# Altium PCB Serializer_System2.PcbDoc
Units mm, origin at the board's own origin, x right, y up, seen from the top; angles counter-clockwise.
Board outline 13 x 16.5 mm, 4 copper layers (Top Layer, MidLayer1, MidLayer2, Bottom Layer), stack 0.767 mm thick; 63 components, 45 nets, 230 pads, 74 vias.
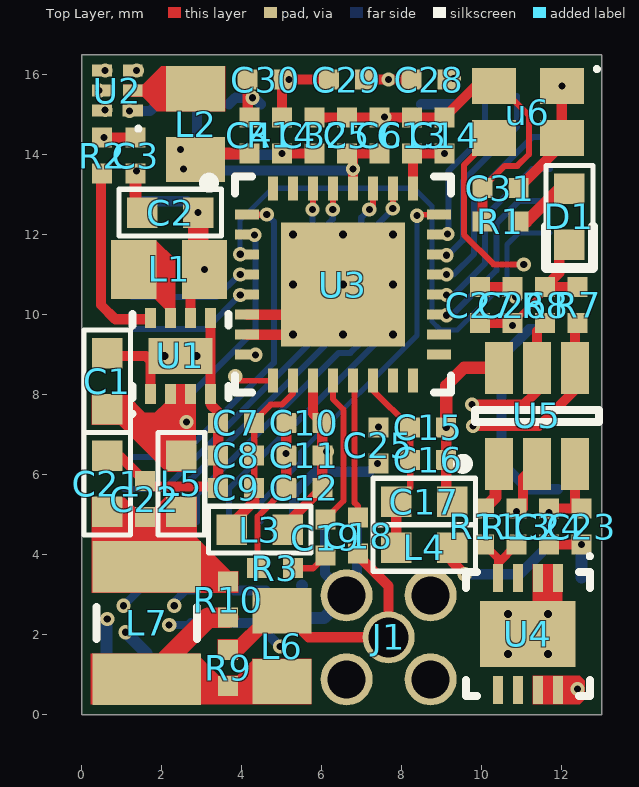
[diagram p0: Top Layer view]
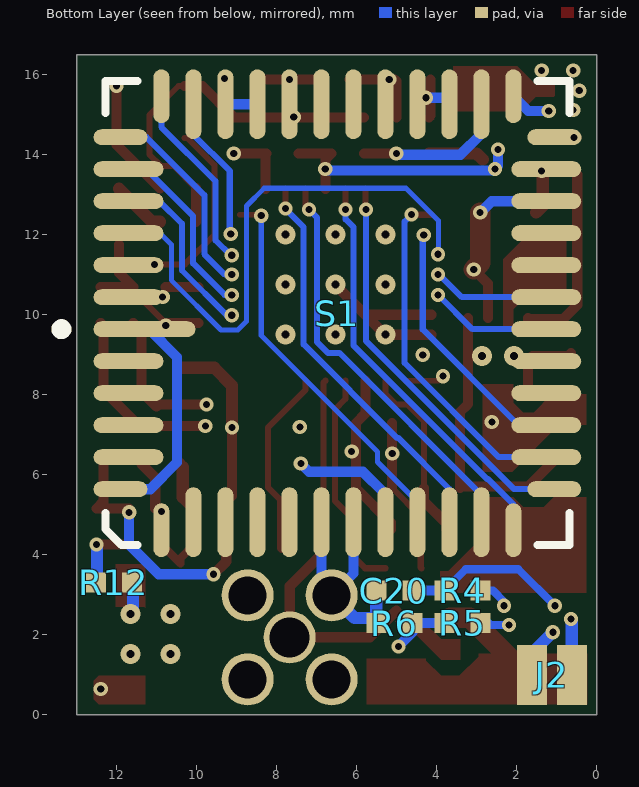
[diagram p1: Bottom Layer view, seen from below]
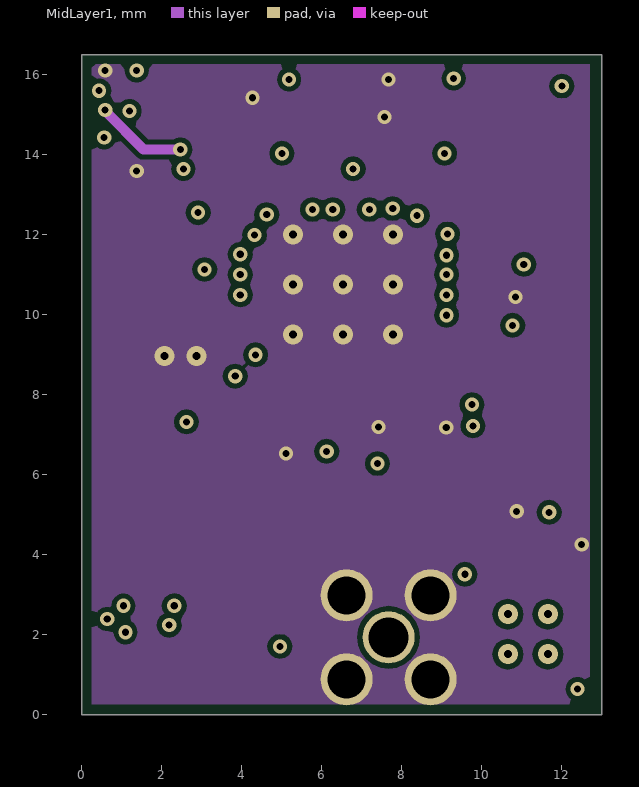
[diagram p2: MidLayer1]
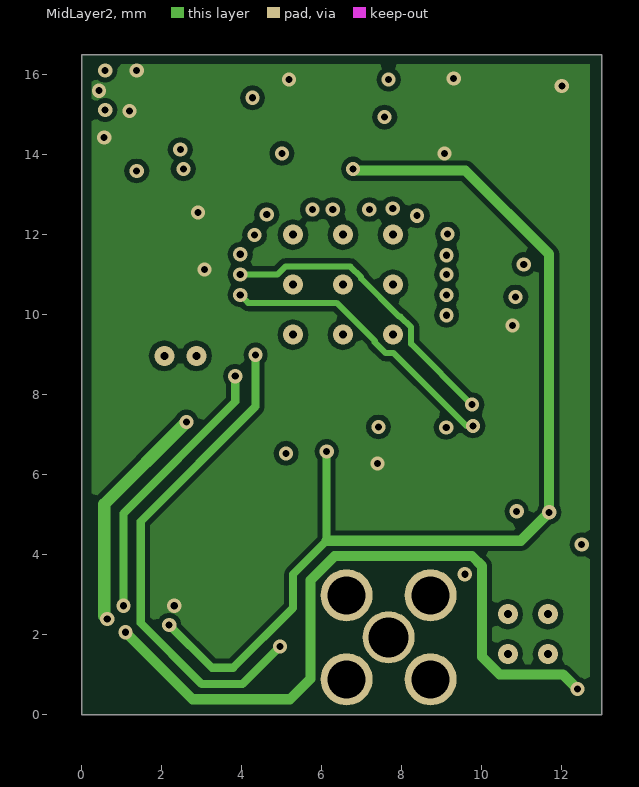
[diagram p3: MidLayer2]

## Layer stack, top to bottom
Top Solder: solder mask 0.0102, Solder Resist, Dk 3.5
Top Layer: signal copper 0.0356
Dielectric1: core 0.1524, FR-4 High TG, Dk 4.8
MidLayer1: signal copper 0.0356
Dielectric2: prepreg 0.32, FR-4 High TG, Dk 4.8
MidLayer2: signal copper 0.0356
Dielectric3: core 0.1524, FR-4 High TG, Dk 4.8
Bottom Layer: signal copper 0.0356
Bottom Solder: solder mask 0.0102, Solder Resist, Dk 3.5

## Board outline
0,0 13,0 13,16.5 0,16.5

## Design rules (kind name [scope] priority, off if disabled: settings)
Clearance [All] p1: gap=0.127
PolygonConnect [All] p1: connectstyle=Direct reliefconductorwidth=0.254 reliefentries=4 polygonreliefangle="90 Angle" airgapwidth=0.254
RoutingVias [All] p1: holewidth=0.254 width=0.559 viastyle="Through Hole" minholewidth=0.178 minwidth=0.356 maxholewidth=0.711 maxwidth=1.27
SolderMaskExpansion [All] p1: expansion=0.025
UnpouredPolygon [All] p1: allowunpoured=FALSE
Width [All] p1: maxlimit=2.54 minlimit=0.127 preferedwidth=0.254 minimp=50.000000 maximp=50.000000 favimp=50.000000
29 further rules are at their usual default settings.

## Classes and differential pairs
component class Connector: J2
net class DIN[0..11]: DIN0 DIN1 DIN2 DIN3 DIN4 DIN5 DIN6 DIN7 DIN8 DIN9 DIN10 DIN11
component class Serializer: C5 C6 C7 C8 C9 C10 C11 C12 C13 C14 C15 C16 C17 C18 C19 C20 L3 L4 R3 R4 R5 R6 R7 R8 U3
component class Power: C1 C2 C3 C4 D1 L1 L2 R1 R2 U1 U2
component class "LED Driver": C23 C24 R11 R12 R13 U4 U5
component class "Coax Port": C21 C22 J1 L5 L6 L7 R9 R10
component class "CMOS Sensor": C23 C24 C25 C26 C27 C30 R14 S1 u6

## Components (designator, comment, footprint, x,y, rotation, side; value= is the part's Value field where it differs from the comment)
C1 "10uF" "SMD Capacitor 0603" 0.635,8.331 r90 top
C2 "22uF" "SMD Capacitor 0603" 2.21,12.548 r180 top
C3 "2.2uF" "SMD CAP 0402" 1.346,13.97 r270 top
C4 "4.7uF" "SMD CAP 0402" 4.191,14.478 r90 top
C5 "0.1uF" "SMD CAP 0402" 6.629,14.478 r90 top
C6 "0.01uF" "SMD CAP 0402" 7.442,14.478 r90 top
C7 "0.1uF" "SMD CAP 0402" 3.861,7.29 r180 top
C8 "0.01uF" "SMD CAP 0402" 3.861,6.477 r180 top
C9 "4.7uF" "SMD CAP 0402" 3.861,5.664 r180 top
C10 "0.1uF" "SMD CAP 0402" 5.563,7.29 r180 top
C11 "0.01uF" "SMD CAP 0402" 5.563,6.477 r180 top
C12 "4.7uF" "SMD CAP 0402" 5.563,5.664 r180 top
C13 "0.1uF" "SMD CAP 0402" 8.255,14.478 r90 top
C14 "0.01uF" "SMD CAP 0402" 9.068,14.478 r90 top
C15 "0.1uF" "SMD CAP 0402" 8.661,7.177 r0 top
C16 "0.01uF" "SMD CAP 0402" 8.661,6.364 r0 top
C17 "22uF" "SMD Capacitor 0603" 8.559,5.322 r0 top
C18 "0.1uF" "SMD CAP 0402" 6.909,4.47 r270 top
C19 "0.047uF" "SMD CAP 0402" 6.096,4.42 r270 top
C20 "10uF" "SMD CAP 0402" 5.055,3.099 r0 bottom
C21 "4.7uF" "SMD Capacitor 0603" 0.635,5.766 r90 top
C22 ".1uF" "SMD CAP 0402" 1.575,5.385 r90 top
C23 "100nF" "SMD CAP 0402" 12.497,4.699 r270 top
C24 "1uF" "SMD CAP 0402" 11.684,4.699 r270 top
C25 "100nF" "SMD CAP 0402" 7.417,6.731 r90 top
C26 "100nF" "SMD CAP 0402" 10.77,10.236 r90 top
C27 "4.7uF" "SMD CAP 0402" 9.957,10.236 r90 top
C28 "100nF" "SMD CAP 0402" 8.687,15.875 r180 top
C29 "4.7uF" "SMD CAP 0402" 6.629,15.875 r0 top
C30 "100nF" "SMD CAP 0402" 4.597,15.875 r180 top
C31 "10nF" "SMD CAP 0402" 10.465,13.157 r180 top
C32 "100nF" "SMD CAP 0402" 5.817,14.478 r90 top
D1 "LED 0603" LED_0603 12.192,12.446 r90 top
J1 "Coax Connector" "SSMCX Throughhole Molex" 7.671,1.93 r0 top
J2 "2 Pin Connector" "2pin smd pad for LED connector" 1.118,0.991 r0 bottom
L1 "Ferrite Bead" LQM21PN2R2MC0D 2.184,11.125 r0 top
L2 "Ferrite Bead" LQM21PN2R2MC0D 2.845,14.757 r270 top
L3 "Ferrite Bead" BLM18KG601SN1D 4.445,4.623 r180 top
L4 "Ferrite Bead" BLM18KG601SN1D 8.56,4.166 r0 top
L5 "Ferrite Bead" BLM18KG601SN1D 2.489,5.766 r90 top
L6 "Ferrite Bead" CIG21L4R7MNE 5.004,1.71 r270 top
L7 "Ferrite Bead" CBC3225T101MR 1.626,2.286 r90 top
R1 "500" "SMD RES 0402" 10.465,12.319 r180 top
R2 "100k" "SMD RES 0402" 0.508,13.97 r90 top
R3 "49.9" "SMD RES 0402" 4.826,3.658 r180 top
R4 "10k" "SMD RES 0402" 3.353,3.099 r0 bottom
R5 "10k" "SMD RES 0402" 3.353,2.286 r180 bottom
R6 "100k" "SMD RES 0402" 5.055,2.286 r180 bottom
R7 "3.3k" "SMD RES 0402" 12.395,10.236 r90 top
R8 "3.3k" "SMD RES 0402" 11.582,10.236 r90 top
R9 "1k" "SMD RES 0402" 3.658,1.168 r270 top
R10 "1k" "SMD RES 0402" 3.658,2.87 r90 top
R11 "1k" "SMD RES 0402" 10.058,4.699 r270 top
R12 "10" "SMD RES 0402" 12.065,3.302 r0 bottom
R13 "1.25k" "SMD RES 0402" 10.871,4.699 r270 top
R14 "10k" "SMD RES 0402" 5.004,14.478 r90 top
S1 "CMOS Sensor MT9V032" "CMOS Sensor MT9V032_HD" 6.477,10.033 r90 bottom
U1 "TPS62172DSGT" DSG8-1600X900TP 2.464,8.966 r90 top
U2 "TPS62231DRYT" DRY6 0.889,15.596 r180 top
U3 "DS90UR913A" "WQFN32 for DS90UB913A" 6.528,10.744 r0 top
U4 "LT3092EDD#PBF" LT-DD-8_V 11.151,2.007 r270 top
U5 "DAC5571IDBVR" TI-DBV6_M 11.379,7.468 r90 top
u6 "OSC_26MHz_EPSON" "OSC SG_211SCE 26MHz" 11.151,15.062 r270 top

## Footprints (in the part's own frame and the unit in brackets; to place one, negate y for a bottom-side part, rotate by r counter-clockwise, add the part's x,y. Pads: shape width x height; smd on the part's side, far side on the other; paste and mask are expansions set on the pad)
"2pin smd pad for LED connector" [mm] "1mm pitch"
  rect 0.75x1.5 smd mask+0: 1(-0.5,0) 2(0.5,0)
BLM18KG601SN1D [mil] "0603 Ferrite Chip 600OHM 1.3A"
  rect 30x30 smd: 1(-27.5,0) 2(27.5,0)
  silkscreen extent -50,-23 50,23, body extent -32,-15 32,15, height 19
CBC3225T101MR [mm] "Chip Inductor, 2-Leads, Body 3.20x2.50mm, IPC Medium Density, 100uH, 340mA, 1.82OHM"
  rect 1.29x2.72 smd: 1(-1.405,0) 2(1.405,0)
  silkscreen extent -0.4,-1.26 0.4,1.26, body extent -1.7,-1.35 1.7,1.35, height 2.7
CIG21L4R7MNE [mm] "SMD 0805 4.7uH, 750mA"
  rect 1.13x1.47 smd: 1(-0.885,0) 2(0.885,0)
  body extent -1.1,-0.72 1.1,0.72, height 1.05
"CMOS Sensor MT9V032_HD" [mm] "LCC, 48-Pins, Body 11.43x11.43mmx2.50mm, Pitch 0.80mm, IPC High Density"
  oval 0.4x2.546 smd: 1(-0.4,4.823)
  oval 0.4x1.746 smd: 2(-1.2,5.223) 3(-2,5.223) 4(-2.8,5.223) 5(-3.6,5.223) 20(-3.6,-5.223) 21(-2.8,-5.223) 22(-2,-5.223) 23(-1.2,-5.223) 24(-0.4,-5.223) 25(0.4,-5.223) 26(1.2,-5.223) 27(2,-5.223) 28(2.8,-5.223) 29(3.6,-5.223) 44(3.6,5.223) 45(2.8,5.223) 46(2,5.223) 47(1.2,5.223) 48(0.4,5.223)
  oval 0.4x1.346 smd: 6(-4.4,5.423) 19(-4.4,-5.423) 30(4.4,-5.423) 43(4.4,5.423)
  oval 1.346x0.4 smd: 7(-5.423,4.4) 18(-5.423,-4.4) 31(5.423,-4.4) 42(5.423,4.4)
  oval 1.746x0.4 smd: 8(-5.223,3.6) 9(-5.223,2.8) 10(-5.223,2) 11(-5.223,1.2) 12(-5.223,0.4) 13(-5.223,-0.4) 14(-5.223,-1.2) 15(-5.223,-2) 16(-5.223,-2.8) 17(-5.223,-3.6) 32(5.223,-3.6) 33(5.223,-2.8) 34(5.223,-2) 35(5.223,-1.2) 36(5.223,-0.4) 37(5.223,0.4) 38(5.223,1.2) 39(5.223,2) 40(5.223,2.8) 41(5.223,3.6)
  silkscreen extent -5.8,-5.8 5.8,7.02, body extent -5.71,-5.71 5.71,5.71, height 2.5
DRY6 [mm] "PSON, 6-Leads, Body 1x1.45mm, Pitch 0.5mm, TI Recommended"
  rect 0.52x0.3 smd paste+0 mask+0.05: 1(-0.385,0.5)
  rect 0.49x0.3 smd paste+0 mask+0.05: 2(-0.385,0) 3(-0.385,-0.5) 4(0.385,-0.5) 5(0.385,0) 6(0.385,0.5)
  silkscreen extent -0.58,0.9 -0.48,1, body extent -0.53,-0.75 0.53,0.75, height 0.6
DSG8-1600X900TP [mm] "SON, 8-Leads, Body 2x2mm, Pitch 0.5mm, Thermal Pad 1.6x0.9mm, TI Recommended"
  rect 0.5x0.28 smd paste-0.14 mask+0.07: 1(-0.95,0.75) 2(-0.95,0.25) 3(-0.95,-0.25) 4(-0.95,-0.75) 5(0.95,-0.75) 6(0.95,-0.25) 7(0.95,0.25) 8(0.95,0.75)
  rect 0.9x1.6 smd paste-0.45 mask+0.07: 9(0,0)
  silkscreen extent -1.5,-1.2 1.05,1.25, body extent -1.05,-1.05 1.05,1.05, height 0.8
LED_0603 [mil] "LTST-C190KGKT"
  rect 30x30 smd: A(-27.5,0) C(27.5,0)
  silkscreen extent -50,-23 50,23, body extent -32,-15 32,15, height 20
LQM21PN2R2MC0D [mm] "SMD Fixed Ind. 2.2uH, 600mA, 0805"
  rect 1.13x1.47 smd: 1(-0.885,0) 2(0.885,0)
  body extent -1.1,-0.72 1.1,0.72, height 1.05
LT-DD-8_V [mm] "SON, 8-Leads, Body 3x3mm, Pitch 0.5mm, Thermal Pad 1.65x2.38 mm, IPC Low Density"
  rect 0.7x0.25 smd mask+0.102: 1(-1.4,0.75) 2(-1.4,0.25) 3(-1.4,-0.25) 4(-1.4,-0.75) 5(1.4,-0.75) 6(1.4,-0.25) 7(1.4,0.25) 8(1.4,0.75)
  rect 1.65x2.38 smd mask+0.102: 9(0,0)
  silkscreen extent -2,-1.55 1.55,1.6, body extent -1.5,-1.5 1.5,1.5, height 0.8
"OSC SG_211SCE 26MHz" [mm] "DFN, 4-Leads, Body 2.50x2.00mm, Pitch 1.70mm, IPC Medium Density"
  rect 0.9x1.1 smd: 1(-0.65,0.85) 2(-0.65,-0.85) 3(0.65,-0.85) 4(0.65,0.85)
  silkscreen extent -1.12,1.68 -1.03,1.77, body extent -1.07,-1.33 1.08,1.32, height 0.8
"SMD CAP 0402" [mm] "Chip Capacitor, 2-Leads, Body 1.00x0.50mm, IPC Medium Density"
  rect 0.5x0.5 smd: 0(-0.45,0) 1(0.45,0)
  body extent -0.53,-0.28 0.53,0.28, height 0.5
"SMD Capacitor 0603" [mil]
  rect 30x30 smd: 0(-27.5,0) 1(27.5,0)
  silkscreen extent -50,-23 50,23, body extent -32,-15 32,15, height 19
"SMD RES 0402" [mm]
  rect 0.5x0.5 smd: 0(-0.45,0) 1(0.45,0)
  body extent -0.53,-0.28 0.53,0.28, height 0.5
"SSMCX Throughhole Molex" [mm] "0734130050"
  round 1.3 hole 1 mask+0: 0(0,0)
  round 1.3 hole 0.95 mask+0: 1(-1.05,-1.05) 1(-1.05,1.05) 1(1.05,-1.05) 1(1.05,1.05)
  body extent -1.27,-1.27 1.28,1.28, height 3.05
TI-DBV6_M [mm] "SOT23, 6-Leads, Body 2.9x1.6mm, Pitch 0.95mm, IPC Low Density"
  rect 1.3x0.7 smd: 1(-1.2,0.95) 2(-1.2,0) 3(-1.2,-0.95) 4(1.2,-0.95) 5(1.2,0) 6(1.2,0.95)
  silkscreen extent -1.32,-1.55 0.15,1.97, body extent -0.87,-1.52 0.87,1.53, height 1.45
"WQFN32 for DS90UB913A" [mm] "QFN, 32-Leads, Body 5.00x5.00mm, Pitch 0.50mm, Thermal Pad 3.10x3.10mm, IPC Medium Density"
  rect 0.6x0.25 smd mask+0: 1(-2.4,1.75) 2(-2.4,1.25) 3(-2.4,0.75) 4(-2.4,0.25) 5(-2.4,-0.25) 6(-2.4,-0.75) 7(-2.4,-1.25) 8(-2.4,-1.75) 17(2.4,-1.75) 18(2.4,-1.25) 19(2.4,-0.75) 20(2.4,-0.25) 21(2.4,0.25) 22(2.4,0.75) 23(2.4,1.25) 24(2.4,1.75)
  rect 0.25x0.6 smd mask+0: 9(-1.75,-2.4) 10(-1.25,-2.4) 11(-0.75,-2.4) 12(-0.25,-2.4) 13(0.25,-2.4) 14(0.75,-2.4) 15(1.25,-2.4) 16(1.75,-2.4) 25(1.75,2.4) 26(1.25,2.4) 27(0.75,2.4) 28(0.25,2.4) 29(-0.25,2.4) 30(-0.75,2.4) 31(-1.25,2.4) 32(-1.75,2.4)
  rect 3.1x3.1 smd paste-4: 33(0,0)
  silkscreen extent -3.47,-2.7 2.7,2.7, body extent -2.55,-2.55 2.55,2.55, height 0.8

## Part data
C1 C2 C3 C4 C5 C6 C7 C8 C9 C10 C11 C12 C13 C14 C15 C16 C17 C18 C19 C20 C21 C22 C23 C24 C25 C26 C27 C28 C29 C30 C31 C32: library part Capacitor
D1: "LTST_C195TBJRKT"
R1 R2 R3 R4 R5 R6 R7 R8 R9 R10 R11 R12 R13 R14: library part Resistor
U1: library part TPS62170DSGT, "Buck Step Down Regulator with 3 to 17 V Input and 0.9 to 6 V Output, -40 to 85 degC, 8-Pin WSON (DSG), Green (RoHS & no Sb/Br)"
U2: "Buck Step Down Regulator with 2.05 to 6 V Input and 1.8 V Output, -40 to 85 degC, 6-Pin SON (DRY), Green (RoHS & no Sb/Br)"
U3: "DS90UR913ASERIALIZER"
U4: "200 mA Two-Terminal Programmable Current Source, 0.3 mA Isupply, 8-pin SON (DD-8), -40 to 125 degC, Pb-Free"
U5: "Low-Power, 8-Bit DAC with High-Speed I2C Input, -40 to 105 degC, 6-pin SOT23 (DBV6), Green (RoHS & no Sb/Br)"

## Via types
v1: diameter 0.356, hole 0.178, Top Layer to Bottom Layer, tented both sides, 59 vias
v2: diameter 0.5, hole 0.2, Top Layer to Bottom Layer, tented both sides, 11 vias
v3: diameter 0.5, hole 0.2, Top Layer to Bottom Layer, 4 vias

## Nets (pads, with @x,y where several pads share a name; then routed paths per layer and width w, separated by ;. In a path a pad name is that pad's centre, name@x,y a point inside that pad or via, vN(x,y) a via of type N, cw(c..) or ccw(c..) an arc to the next point about the centre after c; other vN are vias at no path point)
DIN0: S1.45 U3.19 | length 4.4
  Bottom Layer w0.152: v1(9.119,9.982) 9.246,9.982 10.363,11.1 10.363,12.268 10.928,12.833 S1.45
DIN1: S1.44 U3.20 | length 4.6
  Bottom Layer w0.152: v1(9.119,10.49) 9.296,10.49 10.084,11.278 10.084,12.46 11.257,13.633 S1.44
DIN2: S1.43 U3.21 | length 5.1
  Bottom Layer w0.152: v1(9.119,10.998) 9.291,10.998 9.804,11.512 9.804,12.981 11.257,14.433 S1.43
DIN3: S1.42 U3.22 | length 4.7
  Bottom Layer w0.152: v1(9.119,11.481) 9.149,11.481 9.525,11.856 9.525,13.335 10.877,14.687 S1.42
DIN4: S1.41 U3.23 | length 3.6
  Bottom Layer w0.152: v1(9.144,12.014) 9.169,12.014 9.169,13.591 10.077,14.498 S1.41
DIN5: S1.15 U3.24 | length 9.8
  Top Layer w0.127: v1(8.382,12.471) 8.405,12.494 U3.24
  Bottom Layer w0.127: S1.15 4.477,5.315 5.474,6.312 5.474,6.566 8.382,9.474 v1(8.382,12.471)
DIN6: S1.16 U3.26 | length 10.1
  Top Layer w0.152: v1(7.772,12.649) 7.778,12.655 U3.26
  Bottom Layer w0.152: S1.16 3.677,5.638 4.948,6.909 4.978,6.909 7.325,9.255 7.325,12.182 7.772,12.63 v1(7.772,12.649)
DIN7: S1.17 U3.27 | length 10.4
  Top Layer w0.152: v1(7.188,12.624) 7.24,12.624 7.278,12.661 U3.27
  Bottom Layer w0.152: S1.17 2.877,5.493 6.425,9.041 6.716,9.041 6.985,9.31 6.985,12.421 v1(7.188,12.624)
DIN8: S1.18 U3.29 | length 10.3
  Top Layer w0.152: v1(6.274,12.624) 6.278,12.628 U3.29
  Bottom Layer w0.152: S1.18 2.077,5.253 2.71,5.886 2.737,5.886 6.075,9.224 6.075,12.182 6.274,12.381 v1(6.274,12.624)
DIN9: S1.19 U3.30 | length 10.1
  Top Layer w0.152: v1(5.766,12.624) 5.778,12.636 U3.30
  Bottom Layer w0.152: S1.19 2.058,5.633 5.766,9.341 v1(5.766,12.624)
DIN10: U3.31
DIN11: U3.32
GND: C1.1 C2.1 C3.1 C4.1 C5.1 C6.1 C7.1 C8.1 C9.1 C10.1 C11.1 C12.1 C13.1 C14.1 C15.1 C16.1 C17.1 C20.1 C21.1 C22.1 C23.1 C24.1 C25.1 C26.1 C27.1 C28.1 C29.1 C30.1 C31.1 C32.1 J1.1 R1.1 R3.1 R6.0 R12.1 R13.0 S1.7 S1.12 S1.13 S1.23 S1.29 S1.33 S1.34 S1.38 S1.48 U1.1 U1.4 U1.5 U1.9 U2.4 U3.6 U3.7 U3.33 U5.2 U5.6 u6.2 | length 45.8
  Top Layer w0.152: R3.1 4.394,3.676 4.394,4.946 C12.1 ; C31.1 10.574,13.716 10.892,13.716 11.176,14 11.176,14.986 10.45,15.712 u6.2
  Top Layer w0.254: C21.1 0.945,6.464 C22.1 1.707,5.702 C9.1@3.411,5.702 ; C1.1 0.699,8.966 1.6,8.966 1.714,8.853 U1.1 ; U1.5 U1.4 3.214,7.759 3.411,7.562 C7.1 C8.1 C9.1@3.411,5.702 ; C9.1 C9.1@3.411,5.702 ; U3.7 v2(5.278,9.494) U3.33@5.778,9.994 ; U3.6 U3.33@5.778,9.994 ; C30.1 4.147,14.972 C4.1 ; C12.1 C11.1 C10.1 ; C32.1 C5.1 C6.1 C13.1 C14.1 9.852,15.712 u6.2 ; v2(6.528,10.744) U3.33@5.778,9.994 ; C29.1@7.105,15.875 C28.1 ; v1(9.111,7.177) C16.1 9.111,5.469 C17.1 ; C27.1 C26.1 ; R1.1 C31.1 ; R13.0 11.033,5.149 11.033,5.922 U5.2 ; C24.1 v1(12.497,4.249)
  Top Layer w0.305: C3.1 1.346,12.713 C2.1 ; v1(9.111,7.177) 9.111,8.222 9.557,8.668 U5.6
  Bottom Layer w0.254: S1.33 3.839,15.418 v1(4.267,15.418) 4.315,15.418 S1.34 ; S1.13 6.077,3.524 6.621,2.98 6.877,3.237 S1.12
  Bottom Layer w0.305: R6.0 C20.1 ; R6.0@5.505,2.413 6.053,2.413 J1.1@6.621,2.98 ; R12.1@12.49,3.429 12.49,4.242 v1(12.497,4.249)
  other v1: 10.871,5.08 5.105,6.528 7.417,7.188 10.846,10.439 1.372,13.589 7.569,14.935 7.671,15.875 0.584,16.104
  other v2: 2.064,8.966 2.864,8.966 6.528,9.494 7.778,9.494 5.278,10.744 7.778,10.744 5.278,11.994 6.528,11.994 7.778,11.994
NetC7_0: C7.0 C8.0 C9.0 L3.2 U3.10 | length 4.5
  Top Layer w0.152: C9.0 C8.0 C7.0 4.311,7.333 4.724,7.747 5.004,7.747 5.278,8.021 U3.10
  Top Layer w0.254: L3.2 3.746,4.765 4.311,5.329 C9.0
NetC15_0: C15.0 C16.0 C17.0 L4.1 U3.14 | length 4.7
  Top Layer w0.152: U3.14 7.278,8.11 C15.0 C16.0 8.211,5.672 C17.0
  Top Layer w0.254: L4.1 C17.0
NetC18_0: C18.0 U3.13 | length 3.5
  Top Layer w0.152: U3.13 6.821,8.301 6.821,5.294 6.909,5.207 C18.0
NetC18_1: C18.1 J1.0 L6.1 R9.0 | length 5.3
  Top Layer w0.254: L6.1 5.668,1.93 J1.0 7.671,3.209 6.909,3.971 C18.1
NetC19_0: C19.0 U3.12 | length 3.8
  Top Layer w0.152: C19.0 6.096,4.895 6.542,5.341 6.542,7.624 6.278,7.888 U3.12
NetC19_1: C19.1 R3.0 | length 0.9
  Top Layer w0.152: R3.0 5.784,3.658 C19.1
NetC20_0: C20.0 R4.1 U3.9 | length 12.1
  Top Layer w0.127: v1(3.835,8.458) 3.949,8.344 U3.9
  MidLayer2 w0.203: v1(1.041,2.718) 1.041,5.029 3.835,7.823 v1(3.835,8.458)
  Bottom Layer w0.203: v1(1.041,2.718) 1.956,3.632 3.269,3.632 R4.1
  Bottom Layer w0.254: R4.1 C20.0
NetC21_0: C21.0 C22.0 L5.1 L7.2 R10.1
NetC32_0: C32.0 R14.0 S1.32 | length 3.9
  Top Layer w0.254: v1(5.004,14.028) C32.0
  Bottom Layer w0.254: S1.32 2.877,14.522 3.404,13.995 4.971,13.995 v1(5.004,14.028)
NetD1_C: D1.C R1.0 | length 1.4
  Top Layer w0.305: R1.0 11.112,12.319 D1.C@11.938,13.144
NetJ2_2: J2.2 U4.7 U4.8 | length 18.9
  MidLayer2 w0.254: v1(1.092,2.057) 2.769,0.381 5.207,0.381 5.717,0.891 5.717,3.355 6.324,3.962 9.754,3.962 10.008,3.708 10.008,1.437 10.442,1.003 12.028,1.003 v1(12.395,0.635)
  Bottom Layer w0.305: v1(1.092,2.057) 1.618,1.532 J2.2
NetL1_1: L1.1 U1.7
NetL2_1: L2.1 U2.2
NetL6_2: L6.2 L7.1 R9.1 R10.0 | length 2.7
  Top Layer w0.508: L7.1 3.165,2.42 R10.0
NetR2_0: R2.0 U1.8 | length 4.7
  Top Layer w0.254: R2.0 0.48,13.492 0.48,10.238 0.838,9.881 1.714,9.881 U1.8
NetR5_0: R5.0 R6.1 U3.8 | length 13.9
  MidLayer2 w0.203: v1(4.343,8.992) 4.343,7.696 1.473,4.826 1.473,2.286 2.997,0.762 4.013,0.762 v1(4.953,1.702)
  Bottom Layer w0.254: R5.0 R6.1 4.605,2.05 v1(4.953,1.702)
NetR7_0: R7.0 S1.24 U3.5 U5.4 | length 14.9
  Top Layer w0.254: v1(9.779,7.214) 11.43,7.214 12.329,8.113 U5.4 12.329,9.72 R7.0
  MidLayer2 w0.152: v1(3.962,10.49) 4.162,10.291 6.372,10.291 7.325,9.338 7.325,9.306 7.59,9.041 7.785,9.041 9.613,7.214 v1(9.779,7.214)
  Bottom Layer w0.152: S1.24 3.105,9.633 v1(3.962,10.49)
NetR8_0: R8.0 S1.25 U3.4 U5.5 | length 14.1
  Top Layer w0.254: v1(9.754,7.747) 10.947,7.747 10.998,7.696 11.379,8.077 U5.5 11.379,9.583 R8.0
  MidLayer2 w0.152: v1(3.962,10.998) 4.891,10.998 5.09,11.197 6.716,11.197 6.981,10.932 6.981,10.9 7.934,9.947 7.966,9.947 8.231,9.682 8.231,9.27 v1(9.754,7.747)
  Bottom Layer w0.152: S1.25 3.366,10.433 3.932,10.998 v1(3.962,10.998)
NetR11_0: R11.0 U5.1 | length 1.3
  Top Layer w0.305: R11.0 10.342,5.432 10.342,6.18 U5.1
NetR11_1: R11.1 R13.1 U4.4 | length 1.3
  Top Layer w0.203: R11.1 10.401,3.907 10.401,3.778 R13.1
NetR12_0: R12.0 U4.1 U4.2 U4.9 | length 0.9
  Bottom Layer w0.305: R12.0@11.59,3.429 11.59,2.568 v3(11.651,2.507)
  other v3: 10.651,1.507 11.651,1.507 10.651,2.507
NetS1_20: S1.20 U3.1 | length 8.8
  Top Layer w0.152: U3.1 4.62,12.494 v1(4.623,12.497)
  Bottom Layer w0.152: S1.20 2.445,6.433 4.801,8.788 4.801,12.319 v1(4.623,12.497)
NetS1_21: S1.21 U3.2 | length 6.5
  Bottom Layer w0.152: S1.21 1.95,7.233 4.343,9.627 4.343,11.963 v1(4.318,11.989)
NetS1_46: S1.46 U3.3 | length 13.6
  Bottom Layer w0.127: v1(3.962,11.506) 3.95,11.519 3.95,12.345 4.762,13.157 8.306,13.157 8.75,12.713 8.75,9.83 8.966,9.614 9.385,9.614 10.63,10.858 10.63,11.747 10.915,12.033 S1.46
NetU3_15: U3.15
NetU3_16: U3.16
NetU3_17: U3.17
NetU3_18: U3.18
SYSCLK: S1.47 u6.3 | length 4.6
  Top Layer w0.152: u6.3 10.228,14.412 9.55,13.734 9.55,11.996 10.294,11.252 v1(11.049,11.252)
V1P8: C4.0 C5.0 C6.0 C10.0 C11.0 C12.0 C23.0 C24.0 L2.2 L3.1 L4.2 R5.1 U2.6 U3.11 U3.28 U5.3 | length 47.8
  Top Layer w0.254: L3.1 5.143,4.795 C12.0 C11.0 C10.0 5.778,7.525 U3.11 ; U3.28 6.778,13.88 C5.0 C6.0 ; L4.2 9.258,3.823 v1(9.576,3.505) ; C24.0 C23.0 12.329,5.317 U5.3
  Top Layer w0.305: L2.2 3,14.028 C4.0
  MidLayer1 w0.254: v1(0.584,15.113) 0.584,15.087 1.548,14.122 v1(2.464,14.122)
  MidLayer2 w0.203: v1(2.184,2.235) 3.251,1.168 3.785,1.168 5.283,2.667 5.283,3.505 6.121,4.343 v1(6.121,6.579)
  MidLayer2 w0.254: 6.121,4.343 10.973,4.343 v1(11.684,5.055) 11.684,11.506 9.594,13.596 6.825,13.596 v1(6.782,13.64)
  Bottom Layer w0.203: v1(2.184,2.235) 2.649,2.235 2.725,2.311 2.827,2.21 R5.1
  Bottom Layer w0.254: v1(2.464,14.122) 2.464,13.716 v1(2.54,13.64) 2.584,13.596 6.738,13.596 v1(6.782,13.64) ; v1(9.576,3.505) 10.947,3.505 11.684,4.242 v1(11.684,5.055)
V3P3: C2.0 C3.0 C13.0 C14.0 C25.0 C26.0 C27.0 C28.0 C29.0 C30.0 C31.0 D1.A L1.2 R2.1 R4.0 R7.1 R8.1 R14.1 S1.1 S1.6 S1.14 S1.28 S1.30 S1.31 S1.35 S1.39 S1.40 U1.6 U2.1 U2.3 U2.5 U3.25 u6.1 u6.4 | length 27.5
  Top Layer w0.152: C26.0 11.582,10.599 R8.1
  Top Layer w0.203: C13.0 C13.0@8.278,14.005
  Top Layer w0.254: R2.1 C3.0 ; U1.6 2.714,10.77 v1(3.069,11.125) ; R14.1 5.004,15.831 C30.0 C29.0 ; C13.0 v1(9.068,14.028) ; U3.25 C13.0@8.278,14.005 ; C27.0 C26.0 ; C31.0 12.001,14.243 u6.4 v1(12.001,15.712) ; D1.A@11.938,11.747 11.938,11.042 R8.1 R7.1
  Top Layer w0.508: v1(2.908,12.548) 2.908,11.286 v1(3.069,11.125)
  Bottom Layer w0.203: v1(2.311,2.718) 2.311,2.819 2.591,3.099 R4.0
  Bottom Layer w0.254: v1(1.194,15.088) 1.709,15.088 S1.31 ; S1.28 2.623,12.833 v1(2.908,12.548) ; S1.14 5.309,4.842 5.309,5.537 5.842,6.071 7.188,6.071 v1(7.391,6.274) ; S1.39 S1.40 ; S1.1 11.185,9.633 10.49,8.938 10.49,6.299 11.156,5.633 S1.6
  other v1: 10.77,9.728 0.559,14.427 0.432,15.596 5.182,15.875 9.296,15.9 1.372,16.104
V5P0: C1.0 J2.1 L5.2 U1.2 U1.3 | length 7.2
  MidLayer2 w0.305: v1(0.635,2.388) 0.559,2.464 0.559,5.258 v1(2.616,7.315)
  Bottom Layer w0.305: J2.1 0.618,2.37 v1(0.635,2.388)
pads on no net: S1.2 S1.3 S1.4 S1.5 S1.8 S1.9 S1.10 S1.11 S1.22 S1.26 S1.27 S1.36 S1.37 U4.3 U4.5 U4.6

## Polygon pours and split planes (outlines as drawn)
GND on MidLayer1 "MidLayer1-Gnd" (solid, pour order 2): 0.254,0.254 12.7,0.254 12.7,16.256 0.254,16.256
V3P3 on MidLayer2 "MidLayer2-V3P3" (solid, remove dead copper, pour order 6): 0.254,0.254 12.7,0.254 12.7,16.256 0.254,16.256

## Other copper
Top Layer:
  region net NetL6_2: 5.74,1.397 5.74,0.254 0.229,0.254 0.229,1.524 2.946,1.524 2.946,1.448 3.429,0.965 3.886,0.965 4.267,1.346 4.267,1.397
  region net NetC18_1: 3.404,1.372 3.404,1.88 3.886,1.88 4.343,2.337 5.029,2.337 4.724,2.032 4.547,2.032 3.886,1.372
  region net NetC21_0: 0.254,3.048 0.254,5.436 1.067,5.436 1.321,5.182 1.829,5.182 2.083,5.436 2.87,5.436 2.87,4.42 3.708,3.581 3.912,3.581 3.912,3.048
  region net V5P0: 2.845,8.255 2.083,8.255 2.083,7.798 1.829,7.544 1.575,7.544 1.118,8.001 0.254,8.001 0.254,7.239 0.94,7.239 2.108,6.071 2.845,6.071
  region net NetL1_1: 0.762,10.389 1.829,10.389 2.083,10.135 2.083,9.677 2.337,9.677 2.337,11.379 1.854,11.862 0.787,11.862 0.762,11.836
  region net NetL2_1: 1.041,15.748 1.524,15.748 1.981,16.205 3.581,16.205 3.581,15.088 1.88,15.088 1.524,15.443 1.067,15.443 1.041,15.469
  region net NetR12_0: 11.278,3.759 12.014,3.759 12.014,2.692 11.303,2.692 11.278,2.667
  region net NetJ2_2: 11.278,0.965 12.446,0.965 12.573,0.838 12.573,0.381 12.446,0.254 11.278,0.254

## Silkscreen, mask and mechanical layers (free items; w line width, h text height)
M1 Board Outline:
  the board outline again, w0
M5 Assembly Top:
  circle w0.254: c12.446,16.002 r0.127
  text "u6_Pin1" at 12.192,16.51 h0.51